# Altium PCB carrier_board.PcbDoc (part 13 of 18)
Units mm, origin at the board's own origin, x right, y up, seen from the top; angles counter-clockwise.
Board outline 146 x 102 mm, 20 copper layers (F.Cu, F.Mask, B.Cu, B.Mask, In1.Cu, F.SilkS, In2.Cu, B.SilkS, F.Adhes, B.Adhes, F.Paste, B.Paste, Dwgs.User, Cmts.User, Eco1.User, Eco2.User, Edge.Cuts, Margin, B.CrtYd, F.CrtYd); 256 components, 384 nets, 1262 pads, 1024 vias.
Unrouted connection lines stored in the file: 117.
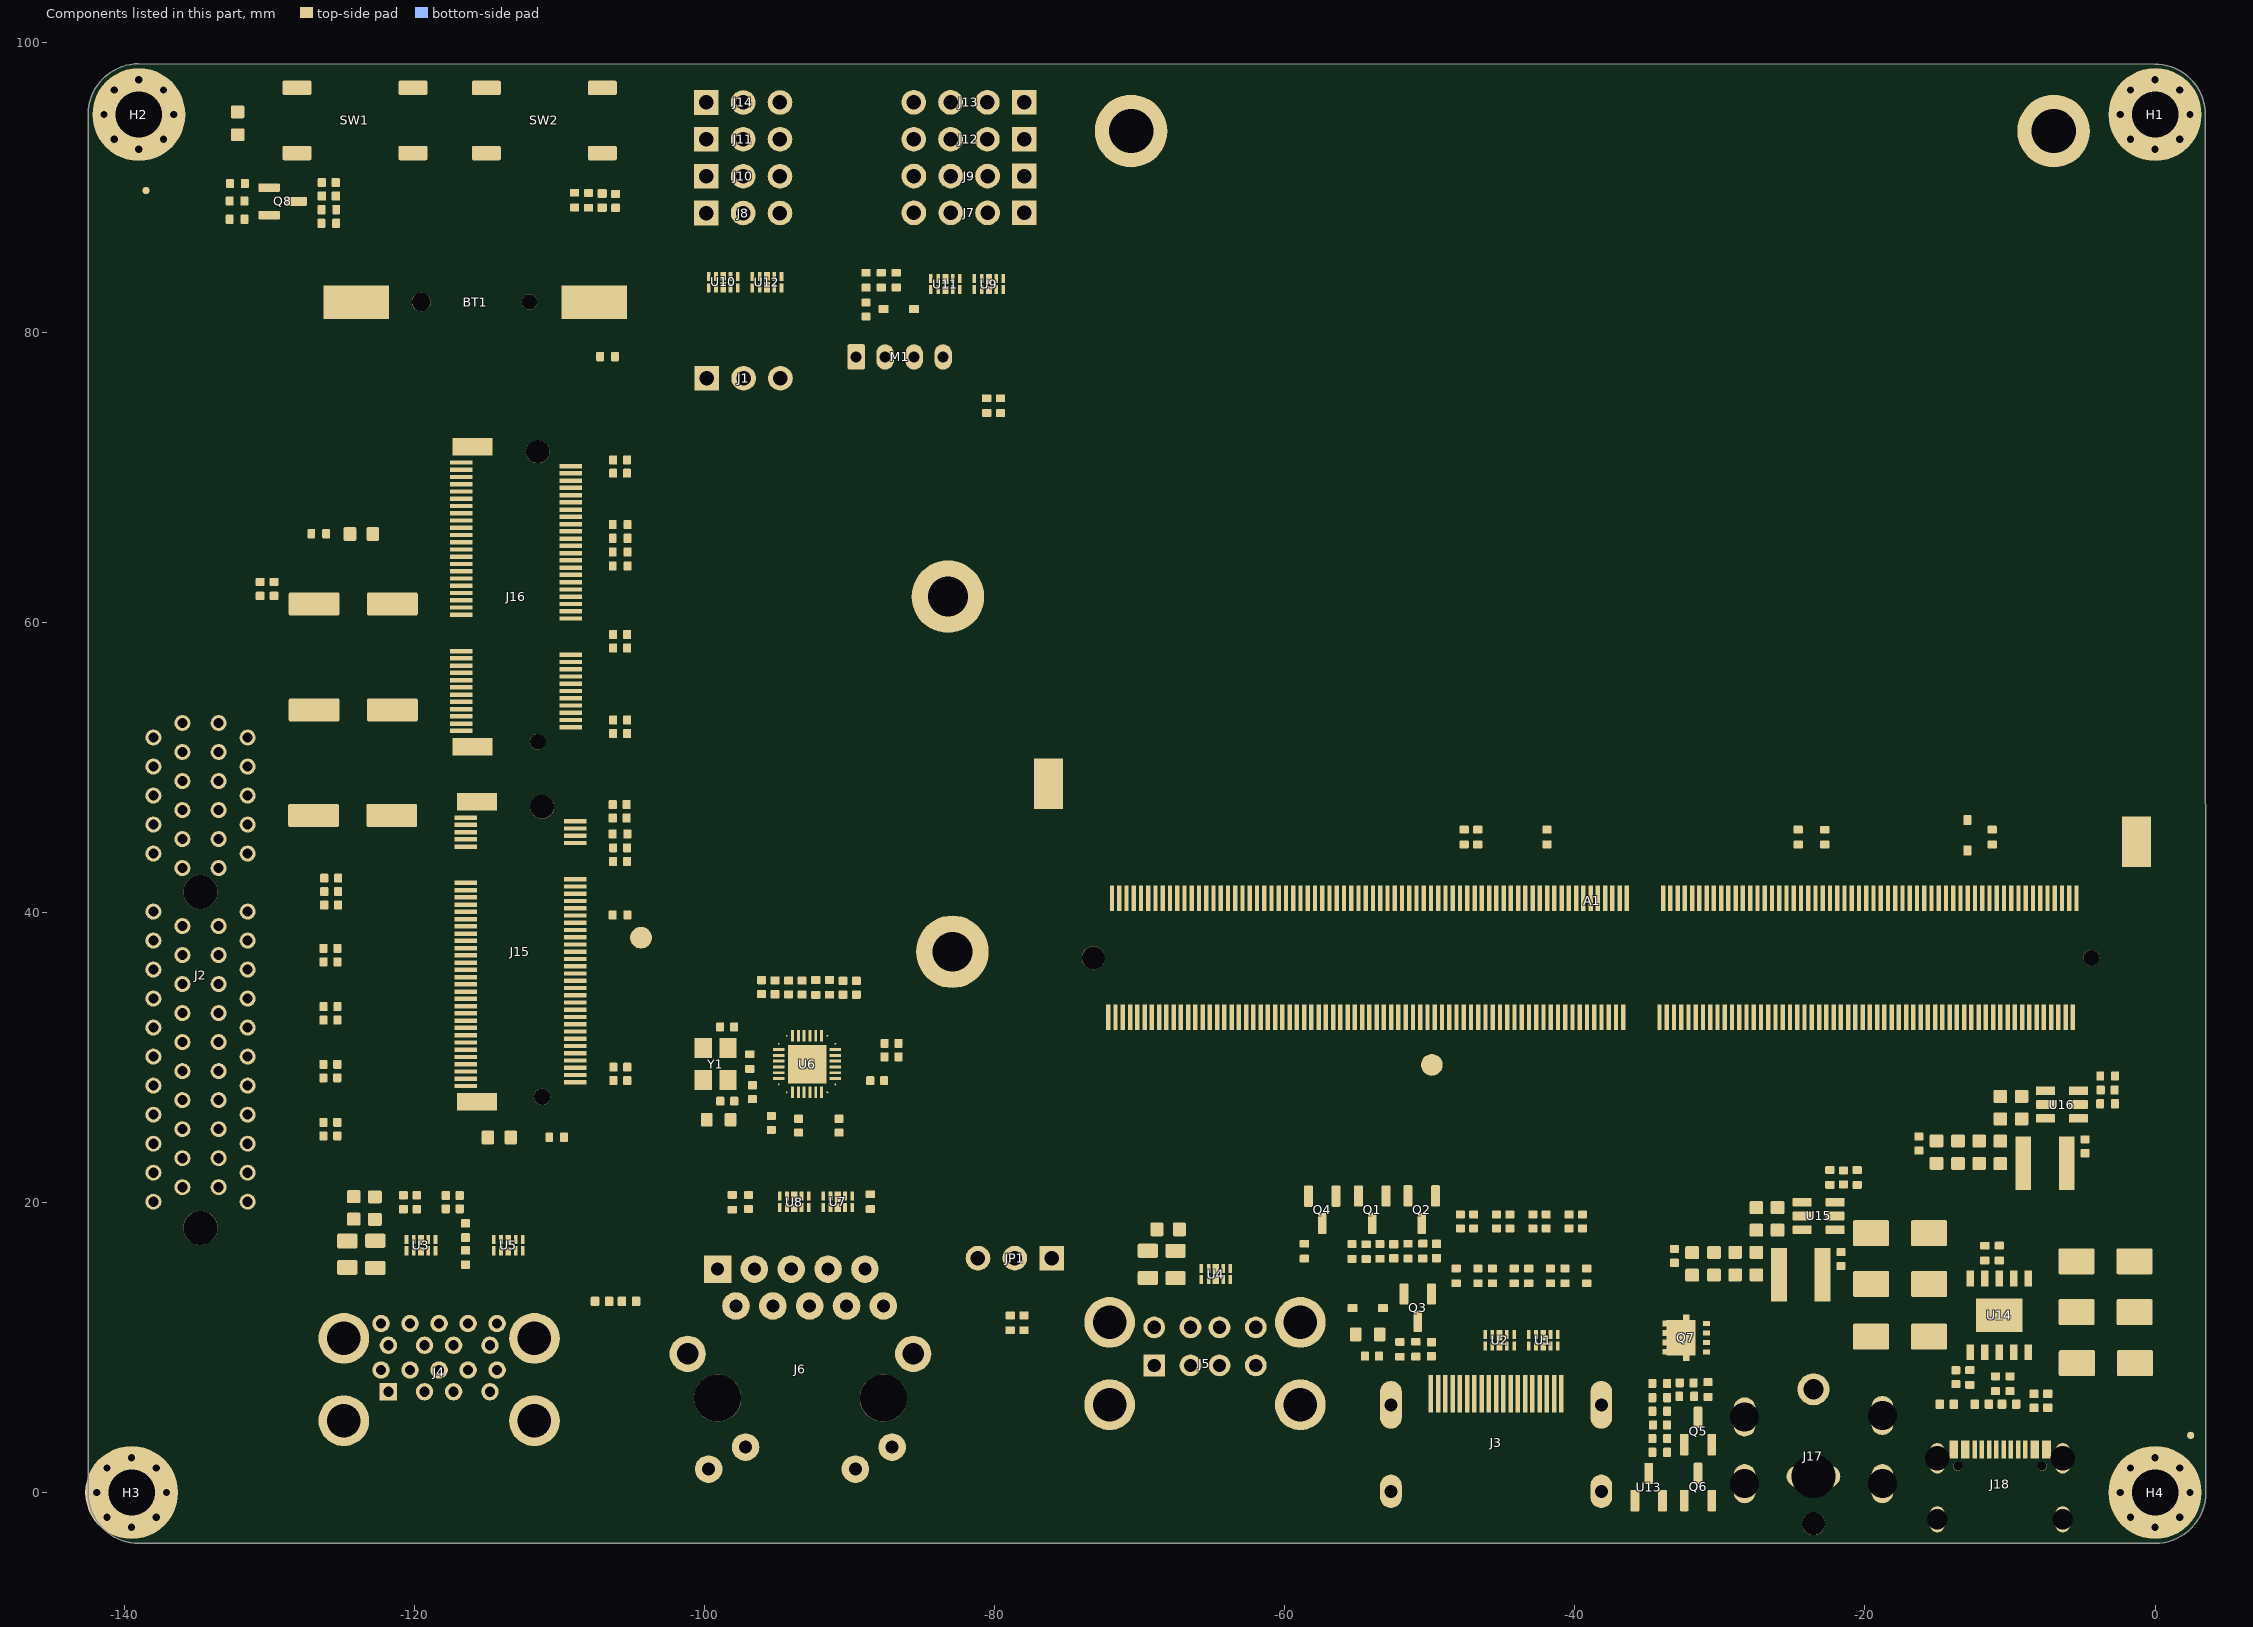
[diagram p23: the components of this part, seen from the top]

## Polygon pours and split planes (outlines as drawn) (continued)
TMDS_D0+ on F.Cu "F.Cu-/HDMI/TMDS_D0+-7" (solid, remove dead copper, pour order 31417): -44.699,14.799 -44.635,14.727 -44.57,14.632 -44.531,14.555 -44.506,14.475 -44.5,14.421 -44.505,14.368 -44.184,14.429 -44.073,14.7 -44.183,14.712 -44.312,14.764 -44.456,14.858 -44.554,14.944
CON_USB3_SSTX_P on F.Cu "F.Cu-/USB2.0&USB3.0/CON_USB3_SSTX_P-3" (solid, remove dead copper, pour order 32049): -120.351,17.007 -120.367,17.121 -120.383,17.188 -120.413,17.323 -120.425,17.462 -120.55,17.446 -120.598,17.133 -120.569,17.128 -120.548,17.115 -120.526,17.073 -120.521,17.013 -120.521,17.007
I2C3_SCL on F.Cu "F.Cu-/GPIO/I2C3_SCL-5" (solid, remove dead copper, pour order 32002): -82.975,82.436 -82.98,82.368 -82.992,82.317 -83.03,82.243 -83.066,82.178 -83.096,82.079 -82.9,82.039 -82.704,82.079 -82.743,82.195 -82.77,82.243 -82.809,82.318 -82.821,82.369 -82.825,82.436
Net-(D26-A) on F.Cu "F.Cu-Net-(D26-A)-4" (solid, remove dead copper, pour order 31310): -86.173,83.816 -86.259,83.887 -86.336,83.946 -86.406,84.014 -86.456,84.088 -86.469,84.128 -86.47,84.169 -86.791,84.091 -86.891,83.82 -86.797,83.813 -86.701,83.769 -86.595,83.682 -86.509,83.591 -86.456,83.533
{\W\A\K\E\}\ on F.Cu "F.Cu-/~{WAKE}-6" (solid, remove dead copper, pour order 31817): -103.806,41.95 -103.728,41.945 -103.672,41.933 -103.607,41.907 -103.543,41.879 -103.449,41.854 -103.409,42.05 -103.449,42.246 -103.581,42.205 -103.607,42.193 -103.686,42.163 -103.806,42.15
TMDS_D0- on F.Cu "F.Cu-/HDMI/TMDS_D0--6" (solid, remove dead copper, pour order 31443): -45.207,14.048 -45.258,14.106 -45.31,14.183 -45.347,14.258 -45.371,14.338 -45.377,14.397 -45.371,14.455 -45.365,14.477 -45.686,14.431 -45.806,14.16 -45.705,14.144 -45.582,14.087 -45.44,13.983 -45.353,13.902
Net-(U6-RSET) on F.Cu "F.Cu-Net-(U6-RSET)" (solid, remove dead copper, pour order 31282): 17 vertices, not listed, extent -98.211,25.3 -97.41,26.1
Net-(D25-A2) on F.Cu "F.Cu-Net-(D25-A2)-3" (solid, remove dead copper, pour order 31596): -106.72,89.51 -106.664,89.505 -106.598,89.488 -106.534,89.462 -106.475,89.423 -106.439,89.386 -106.412,89.341 -106.399,89.291 -106.129,89.53 -106.354,89.799 -106.392,89.758 -106.473,89.727 -106.611,89.711 -106.706,89.71 -106.72,89.71
+3V3 on F.Cu "F.Cu-+3V3-68" (solid, remove dead copper, pour order 31591): -106.85,29.22 -106.779,29.214 -106.695,29.196 -106.628,29.17 -106.569,29.132 -106.538,29.098 -106.517,29.057 -106.513,29.04 -106.289,29.32 -106.513,29.6 -106.545,29.533 -106.612,29.479 -106.718,29.438 -106.85,29.42
CON_PCIE_TX_0- on F.Cu "F.Cu-/M.2 E&M Key/CON_PCIE_TX_0--1" (solid, remove dead copper, pour order 31487): -115.845,61.481 -115.846,61.481 -115.887,61.483 -115.937,61.492 -115.978,61.517 -115.99,61.538 -115.995,61.566 -116.771,61.51 -116.78,61.36 -116.463,61.358 -116.153,61.332 -115.845,61.311
SOC_UART0_TX on F.Cu "F.Cu-/GPIO/SOC_UART0_TX-2" (solid, remove dead copper, pour order 31978): -96.775,82.066 -96.78,82.003 -96.792,81.955 -96.839,81.876 -96.882,81.81 -96.916,81.709 -96.72,81.669 -96.524,81.709 -96.564,81.837 -96.58,81.869 -96.611,81.947 -96.625,82.066
SOC_UART0_TX on F.Cu "F.Cu-/GPIO/SOC_UART0_TX-1" (solid, remove dead copper, pour order 32129): -96.775,83.49 -96.775,83.475 -96.779,83.405 -96.794,83.377 -96.825,83.365 -96.7,83.052 -96.575,83.365 -96.596,83.37 -96.611,83.382 -96.625,83.427 -96.625,83.475 -96.625,83.49
Net-(U6-CKXTAL1) on F.Cu "F.Cu-Net-(U6-CKXTAL1)-4" (solid, remove dead copper, pour order 31647): -96.77,30.76 -96.789,30.678 -96.816,30.629 -96.854,30.583 -96.899,30.544 -96.952,30.514 -97.006,30.496 -97.064,30.489 -97.073,30.488 -96.88,30.219 -96.56,30.355 -96.592,30.412 -96.614,30.53 -96.62,30.732 -96.62,30.76
SOC_UART1_TX on F.Cu "F.Cu-/GPIO/SOC_UART1_TX-4" (solid, remove dead copper, pour order 32132): -96.275,83.49 -96.275,83.475 -96.279,83.405 -96.294,83.377 -96.325,83.365 -96.2,83.052 -96.075,83.365 -96.096,83.37 -96.111,83.382 -96.125,83.427 -96.125,83.475 -96.125,83.49
HSIO_2_RX- on F.Cu "F.Cu-/LattePanda Module/HSIO_2_RX-" (solid, remove dead copper, pour order 31915): -112.673,38.059 -112.622,38.054 -112.585,38.041 -112.539,37.997 -112.522,37.972 -112.484,37.918 -112.421,37.863 -112.309,38.029 -112.271,38.225 -112.376,38.241 -112.45,38.243 -112.511,38.238 -112.673,38.229
GND on F.Cu "F.Cu-GND-156" (solid, remove dead copper, pour order 31789): -53.065,33.794 -53.06,33.875 -53.048,33.932 -53.024,33.994 -52.998,34.058 -52.974,34.151 -53.17,34.191 -53.366,34.151 -53.326,34.023 -53.31,33.991 -53.279,33.913 -53.265,33.794
I2C2_SDA on F.Cu "F.Cu-/GPIO/I2C2_SDA-2" (solid, remove dead copper, pour order 32137): -79.475,83.37 -79.475,83.355 -79.479,83.285 -79.494,83.257 -79.525,83.245 -79.4,82.932 -79.275,83.245 -79.296,83.25 -79.311,83.262 -79.325,83.307 -79.325,83.355 -79.325,83.37
+BATT on F.Cu "F.Cu-+BATT-2" (solid, remove dead copper, pour order 31980): -43.59,36.964 -43.585,37.034 -43.573,37.086 -43.538,37.158 -43.503,37.223 -43.474,37.321 -43.67,37.361 -43.866,37.321 -43.827,37.207 -43.797,37.156 -43.757,37.081 -43.745,37.031 -43.74,36.964
CON_PCIE_TX_1+ on F.Cu "F.Cu-/M.2 E&M Key/CON_PCIE_TX_1+-1" (solid, remove dead copper, pour order 31490): -115.545,40.001 -115.546,40.001 -115.587,40.003 -115.637,40.012 -115.678,40.037 -115.69,40.058 -115.695,40.086 -116.471,40.03 -116.48,39.88 -116.163,39.878 -115.853,39.852 -115.545,39.831
Net-(J15-DEVSLP) on F.Cu "F.Cu-Net-(J15-DEVSLP)-1" (solid, remove dead copper, pour order 31116): 19 vertices, not listed, extent -105.297,38.104 -104.234,39.12
GND on F.Cu "F.Cu-GND-155" (solid, remove dead copper, pour order 31805): -11.315,41.994 -11.31,42.075 -11.298,42.132 -11.274,42.194 -11.248,42.258 -11.224,42.351 -11.42,42.391 -11.616,42.351 -11.576,42.223 -11.56,42.191 -11.529,42.113 -11.515,41.994
GND on F.Cu "F.Cu-GND-154" (solid, remove dead copper, pour order 31747): -115.966,66.41 -115.883,66.405 -115.823,66.393 -115.764,66.371 -115.7,66.347 -115.609,66.324 -115.569,66.52 -115.609,66.716 -115.734,66.676 -115.77,66.658 -115.847,66.624 -115.966,66.61
+3V3 on F.Cu "F.Cu-+3V3-67" (solid, remove dead copper, pour order 31693): -51.4,15.62 -51.394,15.684 -51.375,15.759 -51.349,15.812 -51.312,15.856 -51.278,15.879 -51.236,15.892 -51.23,15.893 -51.5,16.131 -51.77,15.893 -51.701,15.866 -51.649,15.808 -51.612,15.715 -51.6,15.62
Net-(U6-CKXTAL1) on F.Cu "F.Cu-Net-(U6-CKXTAL1)-3" (solid, remove dead copper, pour order 32151): -95.385,29.665 -95.354,29.667 -95.286,29.67 -95.256,29.661 -95.235,29.64 -94.884,29.74 -95.235,29.84 -95.267,29.813 -95.327,29.809 -95.354,29.812 -95.385,29.815
CC1 on F.Cu "F.Cu-/PSU/CC1-5" (solid, remove dead copper, pour order 31386): -9.84,15.575 -9.846,15.505 -9.869,15.422 -9.894,15.375 -9.929,15.34 -9.959,15.325 -9.995,15.32 -9.74,14.769 -9.485,15.32 -9.519,15.325 -9.548,15.338 -9.595,15.389 -9.628,15.476 -9.64,15.575
GbE_PCIe_CLK+ on F.Cu "F.Cu-/Gigabit Ethernet/GbE_PCIe_CLK+-2" (solid, remove dead copper, pour order 31972): -48.855,42.673 -48.963,42.794 -49.029,42.867 -49.141,42.954 -49.253,42.788 -49.291,42.591 -49.194,42.588 -49.143,42.597 -49.102,42.605 -49.062,42.604 -49.021,42.589 -48.975,42.552
GND on F.Cu "F.Cu-GND-153" (solid, remove dead copper, pour order 31806): -9.565,33.794 -9.56,33.875 -9.548,33.932 -9.524,33.994 -9.498,34.058 -9.474,34.151 -9.67,34.191 -9.866,34.151 -9.826,34.023 -9.81,33.991 -9.779,33.913 -9.765,33.794
GbE_PCIe_RX- on F.Cu "F.Cu-/Gigabit Ethernet/GbE_PCIe_RX--2" (solid, remove dead copper, pour order 31921): -80.611,44.983 -80.616,44.932 -80.629,44.895 -80.673,44.849 -80.698,44.832 -80.752,44.794 -80.807,44.731 -80.641,44.619 -80.445,44.581 -80.429,44.686 -80.427,44.76 -80.432,44.821 -80.441,44.983
GND on F.Cu "F.Cu-GND-152" (solid, remove dead copper, pour order 31395): -104.78,52.53 -104.847,52.525 -104.929,52.518 -105.012,52.521 -105.08,52.548 -105.103,52.574 -105.117,52.61 -105.341,52.33 -105.117,52.05 -105.106,52.082 -105.088,52.105 -105.03,52.135 -104.936,52.142 -104.847,52.135 -104.78,52.13
+3V3 on F.Cu "F.Cu-+3V3-66" (solid, remove dead copper, pour order 31829): -49.985,13.046 -49.99,12.968 -50.002,12.912 -50.028,12.847 -50.056,12.783 -50.081,12.689 -49.885,12.649 -49.689,12.689 -49.73,12.821 -49.742,12.847 -49.772,12.926 -49.785,13.046
GND on F.Cu "F.Cu-GND-151" (solid, remove dead copper, pour order 31766): -31.015,39.926 -31.02,39.846 -31.032,39.788 -31.056,39.726 -31.082,39.662 -31.106,39.569 -30.91,39.529 -30.714,39.569 -30.754,39.697 -30.77,39.729 -30.801,39.807 -30.815,39.926
TMDS_D2- on F.Cu "F.Cu-/HDMI/TMDS_D2--5" (solid, remove dead copper, pour order 31435): -40.353,14.958 -40.462,14.859 -40.606,14.76 -40.682,14.725 -40.758,14.704 -40.806,14.7 -40.686,14.429 -40.365,14.383 -40.377,14.475 -40.354,14.583 -40.292,14.706 -40.207,14.812
+3V3 on F.Cu "F.Cu-+3V3-65" (solid, remove dead copper, pour order 31581): -105.41,66.38 -105.416,66.295 -105.437,66.194 -105.463,66.129 -105.501,66.073 -105.532,66.045 -105.57,66.027 -105.31,65.789 -105.05,66.027 -105.112,66.066 -105.162,66.141 -105.198,66.257 -105.21,66.38
+3V3 on F.Cu "F.Cu-+3V3-64" (solid, remove dead copper, pour order 31813): -106.196,24.39 -106.118,24.385 -106.062,24.373 -105.997,24.347 -105.933,24.319 -105.839,24.294 -105.799,24.49 -105.839,24.686 -105.971,24.645 -105.997,24.633 -106.076,24.603 -106.196,24.59
Net-(U13-K) on F.Cu "F.Cu-Net-(U13-K)-2" (solid, remove dead copper, pour order 31498): -34.787,7.133 -34.789,7.043 -34.805,6.936 -34.821,6.884 -34.844,6.839 -34.877,6.802 -34.92,6.779 -34.66,6.542 -34.4,6.779 -34.459,6.817 -34.501,6.888 -34.527,7 -34.533,7.133
CON_USB4_D_P on F.Cu "F.Cu-/USB2.0&USB3.0/CON_USB4_D_P-4" (solid, remove dead copper, pour order 31176): 19 vertices, not listed, extent -118.355,9.651 -117.299,10.738
CON_PCIE_TX_0+ on F.Cu "F.Cu-/M.2 E&M Key/CON_PCIE_TX_0+-1" (solid, remove dead copper, pour order 31549): -106.803,58.464 -106.721,58.41 -106.678,58.363 -106.639,58.307 -106.609,58.244 -106.589,58.175 -106.58,58.069 -106.299,58.22 -106.262,58.53 -106.368,58.521 -106.528,58.545 -106.736,58.609 -106.803,58.634
HSIO_2_TX- on F.Cu "F.Cu-/LattePanda Module/HSIO_2_TX--2" (solid, remove dead copper, pour order 31931): -65.694,36.987 -65.689,37.038 -65.676,37.075 -65.632,37.121 -65.607,37.138 -65.553,37.176 -65.498,37.239 -65.664,37.351 -65.86,37.389 -65.876,37.284 -65.878,37.21 -65.873,37.149 -65.864,36.987
{\P\W\R\_\L\E\D\}\{\s\l\a\s\h\}\{PSON} on F.Cu "F.Cu-/~{PWR_LED}{slash}~{PSON}-3" (solid, remove dead copper, pour order 31983): -71.733,72.097 -71.688,72.045 -71.661,72.001 -71.635,71.922 -71.615,71.85 -71.566,71.759 -71.399,71.869 -71.289,72.036 -71.399,72.091 -71.452,72.105 -71.532,72.132 -71.576,72.159 -71.627,72.203
GND on F.Cu "F.Cu-GND-150" (solid, remove dead copper, pour order 32016): -90.81,24.63 -90.805,24.524 -90.792,24.453 -90.78,24.409 -90.746,24.271 -90.55,24.309 -90.439,24.476 -90.52,24.513 -90.558,24.522 -90.599,24.533 -90.631,24.55 -90.652,24.579 -90.66,24.63
+1V0 on F.Cu "F.Cu-+1V0-14" (solid, remove dead copper, pour order 32152): -93.61,31.99 -93.607,31.958 -93.605,31.89 -93.614,31.861 -93.635,31.84 -93.535,31.489 -93.435,31.84 -93.461,31.872 -93.465,31.932 -93.463,31.958 -93.46,31.99
+3V3 on F.Cu "F.Cu-+3V3-63" (solid, remove dead copper, pour order 31625): -95.475,26.52 -95.495,26.401 -95.522,26.33 -95.561,26.266 -95.598,26.225 -95.642,26.195 -95.68,26.183 -95.4,25.959 -95.12,26.183 -95.19,26.215 -95.253,26.285 -95.303,26.395 -95.325,26.52
HSIO_11_RX+ on F.Cu "F.Cu-/LattePanda Module/HSIO_11_RX+" (solid, remove dead copper, pour order 31924): -57.886,36.753 -57.891,36.702 -57.904,36.665 -57.948,36.619 -57.973,36.602 -58.027,36.564 -58.082,36.501 -57.916,36.389 -57.72,36.351 -57.704,36.456 -57.702,36.53 -57.707,36.591 -57.716,36.753
HSIO_8_RX+ on F.Cu "F.Cu-/LattePanda Module/HSIO_8_RX+" (solid, remove dead copper, pour order 31927): -62.386,36.753 -62.391,36.702 -62.404,36.665 -62.448,36.619 -62.473,36.602 -62.527,36.564 -62.582,36.501 -62.416,36.389 -62.22,36.351 -62.204,36.456 -62.202,36.53 -62.207,36.591 -62.216,36.753
Net-(J6-PadL3) on F.Cu "F.Cu-Net-(J6-PadL3)" (solid, remove dead copper, pour order 31020): 25 vertices, not listed, extent -97.36,2.945 -96.092,4.213
GND on F.Cu "F.Cu-GND-149" (solid, remove dead copper, pour order 31753): -115.496,67.674 -115.441,67.613 -115.409,67.563 -115.382,67.504 -115.354,67.441 -115.306,67.359 -115.139,67.469 -115.029,67.636 -115.147,67.697 -115.182,67.71 -115.26,67.741 -115.354,67.816
REFCLK2- on F.Cu "F.Cu-/LattePanda Module/REFCLK2--1" (solid, remove dead copper, pour order 31910): -46.843,35.899 -46.792,35.894 -46.755,35.881 -46.709,35.837 -46.692,35.812 -46.654,35.758 -46.591,35.703 -46.479,35.869 -46.441,36.065 -46.546,36.081 -46.62,36.083 -46.681,36.078 -46.843,36.069
GND on F.Cu "F.Cu-GND-148" (solid, remove dead copper, pour order 31760): -52.515,39.926 -52.52,39.846 -52.532,39.788 -52.556,39.726 -52.582,39.662 -52.606,39.569 -52.41,39.529 -52.214,39.569 -52.254,39.697 -52.27,39.729 -52.301,39.807 -52.315,39.926
+3V3 on F.Cu "F.Cu-+3V3-62" (solid, remove dead copper, pour order 31633): -88.68,21.1 -88.686,21.027 -88.706,20.939 -88.732,20.88 -88.769,20.832 -88.801,20.808 -88.84,20.795 -88.844,20.795 -88.57,20.559 -88.304,20.8 -88.371,20.826 -88.424,20.885 -88.464,20.981 -88.48,21.1
TMDS_D2+ on F.Cu "F.Cu-/HDMI/TMDS_D2+-6" (solid, remove dead copper, pour order 32090): -41.077,10.448 -41.082,10.48 -41.09,10.541 -41.08,10.564 -41.055,10.572 -41.18,10.886 -41.305,10.572 -41.285,10.568 -41.274,10.555 -41.271,10.513 -41.278,10.48 -41.283,10.448
HSIO_1_TX- on F.Cu "F.Cu-/LattePanda Module/HSIO_1_TX--1" (solid, remove dead copper, pour order 31940): -80.137,20.449 -80.299,20.458 -80.398,20.464 -80.539,20.445 -80.501,20.249 -80.389,20.083 -80.317,20.149 -80.288,20.192 -80.264,20.226 -80.236,20.254 -80.196,20.272 -80.137,20.279
GND on F.Cu "F.Cu-GND-147" (solid, remove dead copper, pour order 31791): -56.065,33.794 -56.06,33.875 -56.048,33.932 -56.024,33.994 -55.998,34.058 -55.974,34.151 -56.17,34.191 -56.366,34.151 -56.326,34.023 -56.31,33.991 -56.279,33.913 -56.265,33.794
GND on F.Cu "F.Cu-GND-146" (solid, remove dead copper, pour order 31556): -99.025,32.69 -99.031,32.609 -99.051,32.512 -99.077,32.442 -99.114,32.381 -99.148,32.348 -99.189,32.325 -99.194,32.323 -98.925,32.099 -98.656,32.323 -98.72,32.363 -98.772,32.439 -98.81,32.556 -98.825,32.69
I2C4_SCL on F.Cu "F.Cu-/GPIO/I2C4_SCL-3" (solid, remove dead copper, pour order 32119): -83.825,82.495 -83.825,82.51 -83.821,82.58 -83.806,82.608 -83.775,82.62 -83.9,82.933 -84.025,82.62 -84.004,82.615 -83.989,82.603 -83.975,82.558 -83.975,82.51 -83.975,82.495
Net-(D9-A) on F.Cu "F.Cu-Net-(D9-A)-1" (solid, remove dead copper, pour order 31244): 17 vertices, not listed, extent -113.363,24.042 -112.487,24.917
{\R\S\T\_\S\W\}\ on F.Cu "F.Cu-/LattePanda Module/~{RST_SW}-2" (solid, remove dead copper, pour order 31422): -107.488,88.199 -107.549,88.268 -107.612,88.359 -107.652,88.437 -107.678,88.518 -107.685,88.576 -107.68,88.632 -108.001,88.571 -108.112,88.3 -108.001,88.288 -107.871,88.236 -107.726,88.142 -107.629,88.058
CON_USB4_SSRX_P on F.Cu "F.Cu-/USB2.0&USB3.0/CON_USB4_SSRX_P-3" (solid, remove dead copper, pour order 32033): -113.001,17.107 -113.001,17.102 -113.01,17.028 -113.033,16.996 -113.078,16.983 -113.03,16.669 -112.905,16.653 -112.893,16.792 -112.863,16.927 -112.841,17.024 -112.831,17.107
+3V3 on F.Cu "F.Cu-+3V3-61" (solid, remove dead copper, pour order 31874): -91.285,35.794 -91.28,35.87 -91.268,35.925 -91.24,35.991 -91.21,36.056 -91.184,36.151 -91.38,36.191 -91.576,36.151 -91.535,36.015 -91.526,35.994 -91.497,35.915 -91.485,35.794
GND on F.Cu "F.Cu-GND-145" (solid, remove dead copper, pour order 31818): -115.696,70.91 -115.618,70.905 -115.562,70.893 -115.497,70.867 -115.433,70.839 -115.339,70.814 -115.299,71.01 -115.339,71.206 -115.471,71.165 -115.497,71.153 -115.576,71.123 -115.696,71.11
I2C3_SDA on F.Cu "F.Cu-/GPIO/I2C3_SDA-2" (solid, remove dead copper, pour order 31047): 23 vertices, not listed, extent -81.197,86.886 -79.783,88.221
HSIO_11_TX- on F.Cu "F.Cu-/LattePanda Module/HSIO_11_TX--1" (solid, remove dead copper, pour order 31899): -58.364,29.651 -58.373,29.486 -58.379,29.385 -58.36,29.241 -58.164,29.279 -57.998,29.391 -58.069,29.473 -58.087,29.488 -58.142,29.548 -58.158,29.59 -58.163,29.651
I2C2_SCL on F.Cu "F.Cu-/GPIO/I2C2_SCL-4" (solid, remove dead copper, pour order 31994): -57.717,77.123 -57.762,77.175 -57.789,77.219 -57.815,77.298 -57.835,77.37 -57.884,77.461 -58.051,77.351 -58.161,77.184 -58.051,77.129 -57.998,77.115 -57.918,77.088 -57.874,77.061 -57.823,77.017
GND on F.Cu "F.Cu-GND-144" (solid, remove dead copper, pour order 31664): -117.395,31.43 -117.369,31.432 -117.289,31.431 -117.258,31.415 -117.245,31.38 -116.469,31.53 -117.245,31.68 -117.25,31.657 -117.262,31.641 -117.307,31.627 -117.369,31.628 -117.395,31.63
DDI_B_DDC_SDA on F.Cu "F.Cu-/HDMI/DDI_B_DDC_SDA-2" (solid, remove dead copper, pour order 31280): -51.732,12.65 -51.727,12.713 -51.71,12.789 -51.684,12.86 -51.645,12.926 -51.608,12.966 -51.564,12.996 -51.517,13.011 -51.785,13.688 -52.074,13.043 -52.02,13.002 -51.977,12.923 -51.947,12.793 -51.938,12.65
GND on F.Cu "F.Cu-GND-143" (solid, remove dead copper, pour order 31872): -45.765,31.876 -45.77,31.8 -45.782,31.745 -45.81,31.679 -45.84,31.614 -45.866,31.519 -45.67,31.479 -45.474,31.519 -45.515,31.655 -45.524,31.676 -45.553,31.755 -45.565,31.876
TMDS_D1+ on F.Cu "F.Cu-/HDMI/TMDS_D1+-7" (solid, remove dead copper, pour order 31461): -42.179,17.697 -42.132,17.785 -42.091,17.83 -42.039,17.87 -41.983,17.9 -41.919,17.921 -41.817,17.93 -41.975,18.211 -42.285,18.238 -42.277,18.137 -42.301,17.981 -42.362,17.768 -42.384,17.697
GND on F.Cu "F.Cu-GND-142" (solid, remove dead copper, pour order 31092): 18 vertices, not listed, extent -62.624,8.761 -61.376,9.998
HSIO_0_TX+ on F.Cu "F.Cu-/LattePanda Module/HSIO_0_TX+-1" (solid, remove dead copper, pour order 31534): -120.523,20.998 -120.575,20.915 -120.621,20.872 -120.676,20.833 -120.738,20.803 -120.806,20.782 -120.915,20.772 -120.762,20.491 -120.452,20.456 -120.461,20.563 -120.438,20.724 -120.375,20.936 -120.353,20.998
CON_USB3_D_P on F.Cu "F.Cu-/USB2.0&USB3.0/CON_USB3_D_P-4" (solid, remove dead copper, pour order 31212): 18 vertices, not listed, extent -118.13,6.12 -117.183,7.067
HSIO_1_TX- on F.Cu "F.Cu-/LattePanda Module/HSIO_1_TX-" (solid, remove dead copper, pour order 31518): -116.375,19.969 -116.598,19.897 -116.729,19.869 -116.852,19.861 -116.916,19.87 -116.881,19.56 -116.6,19.407 -116.587,19.53 -116.539,19.647 -116.46,19.744 -116.375,19.799
DDI_B_DDC_SDA on F.Cu "F.Cu-/HDMI/DDI_B_DDC_SDA-1" (solid, remove dead copper, pour order 31389): 17 vertices, not listed, extent -51.786,13.542 -51.194,14.3
Net-(U6-CKXTAL2) on F.Cu "F.Cu-Net-(U6-CKXTAL2)-4" (solid, remove dead copper, pour order 31220): 20 vertices, not listed, extent -98.386,28.081 -97.285,29.14
PWR_EN on F.Cu "F.Cu-/PSU/PWR_EN-7" (solid, remove dead copper, pour order 31846): -32.35,0.434 -32.345,0.512 -32.333,0.568 -32.307,0.633 -32.279,0.697 -32.254,0.791 -32.45,0.831 -32.646,0.791 -32.605,0.659 -32.593,0.633 -32.563,0.554 -32.55,0.434
PCIE30_TX3_P on F.Cu "F.Cu-/PCIe x4/PCIE30_TX3_P-1" (solid, remove dead copper, pour order 31526): -126.783,25.106 -126.601,25.17 -126.492,25.198 -126.383,25.216 -126.308,25.219 -126.242,25.21 -126.279,25.52 -126.56,25.671 -126.573,25.548 -126.621,25.43 -126.701,25.331 -126.783,25.276
+1V0 on F.Cu "F.Cu-+1V0-13" (solid, remove dead copper, pour order 32163): 19 vertices, not listed, extent -95.341,33.171 -95.07,33.294
PWR_EN on F.Cu "F.Cu-/PSU/PWR_EN-6" (solid, remove dead copper, pour order 31276): -32.55,0.483 -32.555,0.411 -32.573,0.326 -32.599,0.248 -32.638,0.177 -32.674,0.135 -32.717,0.103 -32.749,0.09 -32.46,-0.556 -32.171,0.09 -32.236,0.131 -32.291,0.209 -32.332,0.33 -32.35,0.483
CC2 on F.Cu "F.Cu-/PSU/CC2-2" (solid, remove dead copper, pour order 31554): -9.018,5.762 -8.931,5.75 -8.826,5.724 -8.736,5.691 -8.656,5.646 -8.613,5.609 -8.582,5.567 -8.574,5.546 -8.344,5.829 -8.574,6.114 -8.619,6.031 -8.691,5.973 -8.783,5.941 -8.842,5.938
GbE_PCIe_CLK+ on F.Cu "F.Cu-/Gigabit Ethernet/GbE_PCIe_CLK+-1" (solid, remove dead copper, pour order 32069): -90.488,30.689 -90.659,30.667 -90.816,30.643 -90.992,30.64 -90.986,30.54 -90.585,30.49 -90.581,30.511 -90.569,30.522 -90.529,30.524 -90.51,30.521 -90.488,30.519
TMDS_CK- on F.Cu "F.Cu-/HDMI/TMDS_CK--4" (solid, remove dead copper, pour order 32092): -46.293,10.547 -46.288,10.515 -46.28,10.454 -46.29,10.431 -46.315,10.422 -46.19,10.109 -46.065,10.422 -46.085,10.427 -46.096,10.44 -46.099,10.482 -46.092,10.515 -46.087,10.547
{\W\A\K\E\}\ on F.Cu "F.Cu-/~{WAKE}-5" (solid, remove dead copper, pour order 31750): -74.004,47.84 -74.087,47.845 -74.147,47.857 -74.206,47.879 -74.27,47.903 -74.361,47.926 -74.401,47.73 -74.361,47.534 -74.236,47.574 -74.2,47.592 -74.123,47.626 -74.004,47.64
REFCLK2+ on F.Cu "F.Cu-/LattePanda Module/REFCLK2+-2" (solid, remove dead copper, pour order 31944): -120.443,38.965 -120.281,38.956 -120.182,38.95 -120.041,38.969 -120.079,39.165 -120.191,39.331 -120.263,39.265 -120.292,39.222 -120.316,39.188 -120.344,39.16 -120.384,39.142 -120.443,39.135
GND on F.Cu "F.Cu-GND-141" (solid, remove dead copper, pour order 31011): 21 vertices, not listed, extent -99.881,92.44 -98.53,94.14
{\C\L\K\R\E\Q\E\}\ on F.Cu "F.Cu-/M.2 E&M Key/~{CLKREQE}-3" (solid, remove dead copper, pour order 31751): -106.684,63.98 -106.767,63.985 -106.827,63.997 -106.886,64.019 -106.95,64.043 -107.041,64.066 -107.081,63.87 -107.041,63.674 -106.916,63.714 -106.88,63.732 -106.803,63.766 -106.684,63.78
Net-(J16-SUSCLK) on F.Cu "F.Cu-Net-(J16-SUSCLK)-1" (solid, remove dead copper, pour order 31663): -108.295,64.86 -108.321,64.858 -108.401,64.859 -108.432,64.875 -108.445,64.91 -109.221,64.76 -108.445,64.61 -108.44,64.633 -108.428,64.649 -108.383,64.663 -108.321,64.662 -108.295,64.66
HSO- on F.Cu "F.Cu-/Gigabit Ethernet/HSO--1" (solid, remove dead copper, pour order 31516): -90.046,33.814 -90.118,34.038 -90.146,34.169 -90.154,34.292 -90.145,34.356 -90.455,34.321 -90.608,34.04 -90.485,34.027 -90.368,33.978 -90.271,33.899 -90.216,33.814
GND on F.Cu "F.Cu-GND-140" (solid, remove dead copper, pour order 31885): -68.065,34.384 -68.06,34.456 -68.048,34.508 -68.015,34.579 -67.982,34.644 -67.954,34.741 -68.15,34.781 -68.346,34.741 -68.302,34.589 -68.276,34.507 -68.265,34.384
TMDS_D1- on F.Cu "F.Cu-/HDMI/TMDS_D1--6" (solid, remove dead copper, pour order 31444): -42.707,14.048 -42.758,14.106 -42.81,14.183 -42.847,14.258 -42.871,14.338 -42.877,14.397 -42.871,14.455 -42.865,14.477 -43.186,14.431 -43.306,14.16 -43.205,14.144 -43.082,14.087 -42.94,13.983 -42.853,13.902
DDI_B_TX3- on F.Cu "F.Cu-/HDMI/DDI_B_TX3-" (solid, remove dead copper, pour order 31464): -47.69,19.683 -47.737,19.595 -47.778,19.55 -47.83,19.51 -47.886,19.48 -47.95,19.459 -48.052,19.45 -47.894,19.169 -47.584,19.142 -47.592,19.243 -47.568,19.399 -47.507,19.612 -47.485,19.683
{\W\A\K\E\}\ on F.Cu "F.Cu-/~{WAKE}-4" (solid, remove dead copper, pour order 31698): -108.07,41.361 -108.071,41.361 -108.118,41.367 -108.137,41.388 -108.145,41.43 -108.921,41.279 -108.145,41.139 -108.127,41.175 -108.071,41.201 -107.94,41.219 -107.929,41.22
SOC_UART1_TX on F.Cu "F.Cu-/GPIO/SOC_UART1_TX-3" (solid, remove dead copper, pour order 31974): -96.275,82.529 -96.28,82.452 -96.292,82.396 -96.319,82.331 -96.347,82.267 -96.373,82.172 -96.177,82.132 -95.981,82.172 -95.997,82.233 -96.018,82.28 -96.059,82.339 -96.105,82.412 -96.12,82.462 -96.125,82.529
GND on F.Cu "F.Cu-GND-139" (solid, remove dead copper, pour order 31799): -14.315,41.994 -14.31,42.075 -14.298,42.132 -14.274,42.194 -14.248,42.258 -14.224,42.351 -14.42,42.391 -14.616,42.351 -14.576,42.223 -14.56,42.191 -14.529,42.113 -14.515,41.994
MDI0- on F.Cu "F.Cu-/Gigabit Ethernet/MDI0--1" (solid, remove dead copper, pour order 31083): 18 vertices, not listed, extent -97.497,14.332 -96.38,15.4
MDI0+ on F.Cu "F.Cu-/Gigabit Ethernet/MDI0+-1" (solid, remove dead copper, pour order 31026): 24 vertices, not listed, extent -98.625,12.859 -97.045,14.292
5V_HDMI_VCC on F.Cu "F.Cu-5V_HDMI_VCC" (solid, remove dead copper, pour order 31236): 18 vertices, not listed, extent -53.845,10.025 -53.075,10.901
+12V on F.Cu "F.Cu-+12V-6" (solid, remove dead copper, pour order 31557): -32.87,8.153 -32.876,8.072 -32.896,7.975 -32.922,7.905 -32.959,7.843 -32.993,7.81 -33.034,7.788 -33.039,7.786 -32.77,7.561 -32.501,7.786 -32.565,7.826 -32.617,7.902 -32.655,8.019 -32.67,8.153
TMDS_D0+ on F.Cu "F.Cu-/HDMI/TMDS_D0+-6" (solid, remove dead copper, pour order 31440): -44.517,13.902 -44.408,14.001 -44.264,14.1 -44.188,14.135 -44.112,14.156 -44.064,14.16 -44.184,14.431 -44.505,14.477 -44.493,14.385 -44.516,14.277 -44.578,14.154 -44.663,14.048
GND on F.Cu "F.Cu-GND-138" (solid, remove dead copper, pour order 31659): -115.845,52.61 -115.871,52.608 -115.951,52.609 -115.982,52.625 -115.995,52.66 -116.771,52.51 -115.995,52.36 -115.99,52.383 -115.978,52.399 -115.933,52.413 -115.871,52.412 -115.845,52.41
Net-(Q4-D) on F.Cu "F.Cu-Net-(Q4-D)-7" (solid, remove dead copper, pour order 31734): -43.79,15.542 -43.812,15.536 -43.835,15.54 -43.884,15.581 -43.938,15.681 -43.948,15.71 -44.185,15.449 -43.899,15.228 -43.87,15.297 -43.79,15.391 -43.651,15.502 -43.584,15.542
PCIE30_TX0_N on F.Cu "F.Cu-/PCIe x4/PCIE30_TX0_N-1" (solid, remove dead copper, pour order 31548): -126.773,36.824 -126.691,36.77 -126.648,36.723 -126.609,36.667 -126.579,36.604 -126.559,36.535 -126.55,36.429 -126.269,36.58 -126.232,36.89 -126.338,36.881 -126.498,36.905 -126.706,36.969 -126.773,36.994
CON_USB4_SSTX_N on F.Cu "F.Cu-/USB2.0&USB3.0/CON_USB4_SSTX_N-3" (solid, remove dead copper, pour order 32064): -118.749,17.882 -118.733,17.769 -118.717,17.702 -118.687,17.567 -118.675,17.428 -118.55,17.444 -118.502,17.758 -118.531,17.762 -118.552,17.775 -118.574,17.817 -118.579,17.877 -118.579,17.882
TMDS_D2+ on F.Cu "F.Cu-/HDMI/TMDS_D2+-5" (solid, remove dead copper, pour order 31332): -41.033,8.255 -41.031,8.227 -41.031,8.148 -41.046,8.117 -41.08,8.105 -40.93,6.804 -40.78,8.105 -40.803,8.11 -40.819,8.122 -40.832,8.167 -40.829,8.227 -40.827,8.255
HSIO_9_TX+ on F.Cu "F.Cu-/LattePanda Module/HSIO_9_TX+-2" (solid, remove dead copper, pour order 31895): -61.667,29.651 -61.671,29.594 -61.685,29.554 -61.729,29.5 -61.743,29.488 -61.785,29.449 -61.832,29.391 -61.666,29.279 -61.47,29.241 -61.453,29.347 -61.451,29.422 -61.457,29.486 -61.466,29.651
REFCLK2- on F.Cu "F.Cu-/LattePanda Module/REFCLK2-" (solid, remove dead copper, pour order 31917): -120.443,38.693 -120.392,38.688 -120.355,38.675 -120.309,38.631 -120.292,38.606 -120.254,38.552 -120.191,38.497 -120.079,38.663 -120.041,38.859 -120.146,38.875 -120.22,38.877 -120.281,38.872 -120.443,38.863
Net-(U6-CKXTAL1) on F.Cu "F.Cu-Net-(U6-CKXTAL1)-2" (solid, remove dead copper, pour order 31508): -97.268,29.726 -97.136,29.829 -97.047,29.879 -96.95,29.92 -96.871,29.942 -96.792,29.95 -96.768,29.95 -96.879,30.221 -97.2,30.282 -97.197,30.183 -97.229,30.06 -97.302,29.922 -97.374,29.832
+3V3 on F.Cu "F.Cu-+3V3-60" (solid, remove dead copper, pour order 31902): -79.504,74.32 -79.452,74.315 -79.414,74.302 -79.366,74.258 -79.351,74.239 -79.313,74.19 -79.253,74.139 -79.141,74.305 -79.102,74.501 -79.232,74.522 -79.322,74.525 -79.366,74.523 -79.504,74.52
{\P\W\R\_\S\W\}\ on F.Cu "F.Cu-/LattePanda Module/~{PWR_SW}-2" (solid, remove dead copper, pour order 31981): -72.09,34.434 -72.085,34.504 -72.073,34.556 -72.038,34.628 -72.003,34.693 -71.974,34.791 -72.17,34.831 -72.366,34.791 -72.327,34.677 -72.297,34.626 -72.257,34.551 -72.245,34.501 -72.24,34.434
DDI_B_DDC_SDA on F.Cu "F.Cu-/HDMI/DDI_B_DDC_SDA" (solid, remove dead copper, pour order 31837): -52.34,18.546 -52.345,18.468 -52.357,18.412 -52.383,18.347 -52.411,18.283 -52.436,18.189 -52.24,18.149 -52.044,18.189 -52.085,18.321 -52.097,18.347 -52.127,18.426 -52.14,18.546
+1V0 on F.Cu "F.Cu-+1V0-12" (solid, remove dead copper, pour order 32000): -93.61,26.523 -93.615,26.455 -93.627,26.404 -93.665,26.33 -93.701,26.265 -93.731,26.166 -93.535,26.126 -93.339,26.166 -93.378,26.283 -93.405,26.33 -93.444,26.406 -93.456,26.456 -93.46,26.523
CC1 on F.Cu "F.Cu-/PSU/CC1-4" (solid, remove dead copper, pour order 31904): -13.195,5.766 -13.217,5.796 -13.224,5.822 -13.207,5.864 -13.169,5.904 -13.104,5.979 -13.271,6.091 -13.466,6.051 -13.448,5.882 -13.444,5.817 -13.431,5.758 -13.398,5.697 -13.336,5.625
CON_USB1_D_P on F.Cu "F.Cu-/USB2.0&USB3.0/CON_USB1_D_P-4" (solid, remove dead copper, pour order 32057): -63.949,15.893 -63.933,15.779 -63.917,15.712 -63.887,15.577 -63.875,15.438 -63.75,15.454 -63.702,15.767 -63.731,15.772 -63.752,15.785 -63.774,15.827 -63.779,15.887 -63.779,15.893
+3V3 on F.Cu "F.Cu-+3V3-59" (solid, remove dead copper, pour order 31503): -105.435,67.32 -105.438,67.231 -105.454,67.124 -105.47,67.072 -105.494,67.026 -105.527,66.99 -105.57,66.967 -105.31,66.729 -105.05,66.967 -105.109,67.005 -105.152,67.076 -105.178,67.188 -105.185,67.32
Net-(Q1-D) on F.Cu "F.Cu-Net-(Q1-D)-1" (solid, remove dead copper, pour order 31256): -53.845,17.532 -53.837,17.653 -53.804,17.792 -53.776,17.847 -53.738,17.892 -53.681,17.925 -53.97,18.571 -54.259,17.925 -54.194,17.885 -54.144,17.811 -54.109,17.695 -54.095,17.532
GND on F.Cu "F.Cu-GND-137" (solid, remove dead copper, pour order 31294): -34.541,1.961 -34.554,1.944 -34.579,1.913 -34.606,1.895 -34.619,1.898 -34.631,1.914 -34.649,1.996 -34.911,1.309 -34.61,1.186 -34.592,1.288 -34.535,1.396 -34.432,1.517 -34.328,1.614 -34.259,1.679
GND on F.Cu "F.Cu-GND-136" (solid, remove dead copper, pour order 31680): -115.845,68.11 -115.871,68.108 -115.951,68.109 -115.982,68.125 -115.995,68.16 -116.771,68.01 -115.995,67.86 -115.99,67.883 -115.978,67.899 -115.933,67.913 -115.871,67.912 -115.845,67.91
HSIO_9_RX- on F.Cu "F.Cu-/LattePanda Module/HSIO_9_RX-" (solid, remove dead copper, pour order 31954): -60.614,36.753 -60.623,36.591 -60.629,36.492 -60.61,36.351 -60.414,36.389 -60.248,36.501 -60.314,36.573 -60.357,36.602 -60.391,36.626 -60.419,36.654 -60.437,36.694 -60.444,36.753
+1V0 on F.Cu "F.Cu-+1V0-11" (solid, remove dead copper, pour order 31624): -95.07,33.79 -95.05,33.909 -95.023,33.979 -94.984,34.044 -94.947,34.085 -94.903,34.114 -94.865,34.127 -95.145,34.351 -95.425,34.127 -95.355,34.094 -95.292,34.024 -95.242,33.915 -95.22,33.79
LED1_1000 on F.Cu "F.Cu-/Gigabit Ethernet/LED1_1000-1" (solid, remove dead copper, pour order 32018): -95.453,30.615 -95.518,30.61 -95.566,30.598 -95.634,30.561 -95.696,30.526 -95.789,30.496 -95.751,30.3 -95.584,30.189 -95.552,30.265 -95.545,30.348 -95.542,30.395 -95.531,30.431 -95.504,30.456 -95.453,30.465
HSI- on F.Cu "F.Cu-/Gigabit Ethernet/HSI--1" (solid, remove dead copper, pour order 32071): -90.488,30.161 -90.51,30.158 -90.56,30.155 -90.578,30.165 -90.585,30.189 -90.986,30.14 -90.992,30.04 -90.827,30.038 -90.659,30.012 -90.488,29.991
REFCLK0- on F.Cu "F.Cu-/LattePanda Module/REFCLK0--2" (solid, remove dead copper, pour order 31951): -60.553,48.231 -60.391,48.222 -60.292,48.216 -60.151,48.235 -60.189,48.431 -60.301,48.597 -60.373,48.531 -60.402,48.488 -60.426,48.454 -60.454,48.426 -60.494,48.408 -60.553,48.401
GND on F.Cu "F.Cu-GND-135" (solid, remove dead copper, pour order 31155): 18 vertices, not listed, extent -15.011,2.079 -14.051,3.255
+3V3 on F.Cu "F.Cu-+3V3-58" (solid, remove dead copper, pour order 31360): -126.42,41.093 -126.415,41.013 -126.408,40.917 -126.412,40.819 -126.438,40.733 -126.464,40.699 -126.5,40.673 -126.22,40.502 -125.94,40.673 -125.994,40.72 -126.025,40.796 -126.032,40.911 -126.025,41.013 -126.02,41.093
HSIO_9_TX- on F.Cu "F.Cu-/LattePanda Module/HSIO_9_TX--2" (solid, remove dead copper, pour order 31532): -124.807,32.984 -124.989,32.92 -125.098,32.892 -125.207,32.874 -125.282,32.871 -125.348,32.88 -125.311,32.57 -125.03,32.419 -125.017,32.542 -124.969,32.66 -124.889,32.759 -124.807,32.814
Net-(Q1-D) on F.Cu "F.Cu-Net-(Q1-D)" (solid, remove dead copper, pour order 31732): -54.095,17.177 -53.955,17.118 -53.863,17.063 -53.784,17.001 -53.743,16.956 -53.721,16.911 -53.72,16.907 -53.44,17.136 -53.677,17.397 -53.709,17.305 -53.747,17.234 -53.778,17.197 -53.811,17.178 -53.845,17.177
+12V on F.Cu "F.Cu-+12V-5" (solid, remove dead copper, pour order 31893): -34.764,2.872 -34.855,2.877 -34.918,2.889 -34.972,2.907 -35.121,2.949 -35.161,2.752 -35.121,2.556 -35.002,2.596 -34.958,2.62 -34.882,2.657 -34.831,2.668 -34.764,2.672
DDC_SCL on F.Cu "F.Cu-/HDMI/DDC_SCL-5" (solid, remove dead copper, pour order 31404): -50.153,17.025 -50.048,17.018 -49.924,16.99 -49.863,16.963 -49.812,16.925 -49.785,16.892 -49.767,16.852 -49.537,17.136 -49.767,17.42 -49.806,17.36 -49.881,17.315 -49.998,17.285 -50.153,17.275
Net-(Q7-G) on F.Cu "F.Cu-Net-(Q7-G)-5" (solid, remove dead copper, pour order 32074): -31.01,12 -31.01,11.987 -31.01,11.938 -31.019,11.885 -31.043,11.843 -31.063,11.83 -31.09,11.825 -30.92,11.649 -30.74,11.825 -30.765,11.83 -30.784,11.843 -30.806,11.889 -30.81,11.981 -30.81,12
GND on F.Cu "F.Cu-GND-134" (solid, remove dead copper, pour order 31763): -60.015,39.666 -60.02,39.585 -60.032,39.528 -60.056,39.466 -60.082,39.402 -60.106,39.309 -59.91,39.269 -59.714,39.309 -59.754,39.437 -59.77,39.469 -59.801,39.547 -59.815,39.666
+3V3 on F.Cu "F.Cu-+3V3-57" (solid, remove dead copper, pour order 31660): -107.995,30.88 -108.021,30.878 -108.101,30.879 -108.132,30.895 -108.145,30.93 -108.921,30.78 -108.145,30.63 -108.14,30.653 -108.128,30.669 -108.083,30.683 -108.021,30.682 -107.995,30.68
Net-(U16-BOOST) on F.Cu "F.Cu-Net-(U16-BOOST)-1" (solid, remove dead copper, pour order 31396): -5.03,24.91 -5.025,24.843 -5.018,24.761 -5.021,24.678 -5.048,24.61 -5.074,24.587 -5.11,24.573 -4.83,24.349 -4.55,24.573 -4.582,24.584 -4.605,24.602 -4.635,24.66 -4.642,24.754 -4.635,24.843 -4.63,24.91
DDC_SCL on F.Cu "F.Cu-/HDMI/DDC_SCL-4" (solid, remove dead copper, pour order 31593): -50.685,17.7 -50.685,17.676 -50.686,17.59 -50.696,17.493 -50.726,17.409 -50.751,17.379 -50.786,17.36 -50.485,17.159 -50.249,17.42 -50.289,17.426 -50.324,17.44 -50.379,17.492 -50.417,17.577 -50.435,17.687 -50.435,17.7
TMDS_D1+ on F.Cu "F.Cu-/HDMI/TMDS_D1+-6" (solid, remove dead copper, pour order 31445): -42.163,14.812 -42.112,14.754 -42.06,14.677 -42.023,14.602 -41.999,14.522 -41.993,14.463 -41.999,14.405 -42.005,14.383 -41.684,14.429 -41.564,14.7 -41.665,14.716 -41.788,14.773 -41.93,14.877 -42.017,14.958
HSIO_8_TX+ on F.Cu "F.Cu-/LattePanda Module/HSIO_8_TX+-1" (solid, remove dead copper, pour order 31543): -124.807,37.266 -124.889,37.32 -124.932,37.367 -124.971,37.423 -125.001,37.486 -125.021,37.555 -125.03,37.661 -125.311,37.51 -125.348,37.2 -125.242,37.209 -125.082,37.185 -124.874,37.121 -124.807,37.096
SUSCLK_WIFI on F.Cu "F.Cu-/LattePanda Module/SUSCLK_WIFI-7" (solid, remove dead copper, pour order 31637): -104.77,64.94 -104.84,64.946 -104.923,64.965 -104.983,64.991 -105.032,65.028 -105.057,65.061 -105.071,65.1 -105.073,65.11 -105.311,64.84 -105.073,64.57 -105.046,64.635 -104.987,64.687 -104.889,64.725 -104.77,64.74
TMDS_D2+ on F.Cu "F.Cu-/HDMI/TMDS_D2+-4" (solid, remove dead copper, pour order 31462): -39.679,17.697 -39.632,17.785 -39.591,17.83 -39.539,17.87 -39.483,17.9 -39.419,17.921 -39.317,17.93 -39.475,18.211 -39.785,18.238 -39.777,18.137 -39.801,17.981 -39.862,17.768 -39.884,17.697
Net-(Q4-D) on F.Cu "F.Cu-Net-(Q4-D)-6" (solid, remove dead copper, pour order 31250): -57.253,17.676 -57.254,17.682 -57.256,17.742 -57.246,17.809 -57.208,17.872 -57.175,17.897 -57.129,17.918 -57.418,18.563 -57.703,17.913 -57.649,17.877 -57.603,17.8 -57.566,17.665 -57.538,17.426 -57.536,17.393
GND on F.Cu "F.Cu-GND-133" (solid, remove dead copper, pour order 31780): -48.565,33.794 -48.56,33.875 -48.548,33.932 -48.524,33.994 -48.498,34.058 -48.474,34.151 -48.67,34.191 -48.866,34.151 -48.826,34.023 -48.81,33.991 -48.779,33.913 -48.765,33.794
Net-(D26-A) on F.Cu "F.Cu-Net-(D26-A)-3" (solid, remove dead copper, pour order 31414): -85.36,81.04 -85.366,81.101 -85.373,81.175 -85.371,81.249 -85.345,81.306 -85.32,81.324 -85.285,81.332 -85.56,81.591 -85.835,81.332 -85.803,81.325 -85.779,81.311 -85.752,81.262 -85.747,81.177 -85.754,81.101 -85.76,81.04
GND on F.Cu "F.Cu-GND-132" (solid, remove dead copper, pour order 31788): -56.815,41.994 -56.81,42.075 -56.798,42.132 -56.774,42.194 -56.748,42.258 -56.724,42.351 -56.92,42.391 -57.116,42.351 -57.076,42.223 -57.06,42.191 -57.029,42.113 -57.015,41.994
MDI1+ on F.Cu "F.Cu-/Gigabit Ethernet/MDI1+-1" (solid, remove dead copper, pour order 32116): -92.986,27.107 -93.005,27.258 -93.028,27.419 -93.035,27.6 -93.135,27.591 -93.161,27.19 -93.138,27.188 -93.122,27.178 -93.105,27.14 -93.102,27.109 -93.102,27.107
TMDS_D1- on F.Cu "F.Cu-/HDMI/TMDS_D1--5" (solid, remove dead copper, pour order 32102): -43.077,10.448 -43.082,10.48 -43.09,10.541 -43.08,10.564 -43.055,10.572 -43.18,10.886 -43.305,10.572 -43.285,10.568 -43.274,10.555 -43.271,10.513 -43.278,10.48 -43.283,10.448
GND on F.Cu "F.Cu-GND-131" (solid, remove dead copper, pour order 31342): -44.33,5.355 -44.332,5.381 -44.331,5.461 -44.315,5.492 -44.28,5.505 -44.43,6.806 -44.58,5.505 -44.557,5.5 -44.541,5.488 -44.527,5.443 -44.528,5.381 -44.53,5.355
HSIO_10_RX- on F.Cu "F.Cu-/LattePanda Module/HSIO_10_RX-" (solid, remove dead copper, pour order 31959): -59.114,36.753 -59.123,36.591 -59.129,36.492 -59.11,36.351 -58.914,36.389 -58.748,36.501 -58.814,36.573 -58.857,36.602 -58.891,36.626 -58.919,36.654 -58.937,36.694 -58.944,36.753
TMDS_CK- on F.Cu "F.Cu-/HDMI/TMDS_CK--3" (solid, remove dead copper, pour order 31436): -47.853,14.958 -47.962,14.859 -48.106,14.76 -48.182,14.725 -48.258,14.704 -48.306,14.7 -48.186,14.429 -47.865,14.383 -47.877,14.475 -47.854,14.583 -47.792,14.706 -47.707,14.812
{\R\S\T\_\S\W\}\ on F.Cu "F.Cu-/LattePanda Module/~{RST_SW}-1" (solid, remove dead copper, pour order 31752): -103.536,82.294 -103.481,82.233 -103.449,82.183 -103.422,82.124 -103.394,82.061 -103.346,81.979 -103.179,82.089 -103.069,82.256 -103.187,82.317 -103.222,82.33 -103.3,82.361 -103.394,82.436
Net-(U14-VDD) on F.Cu "F.Cu-Net-(U14-VDD)-2" (solid, remove dead copper, pour order 31377): -12.615,8.865 -12.613,8.935 -12.598,9.019 -12.582,9.058 -12.559,9.09 -12.527,9.112 -12.485,9.12 -12.74,9.671 -12.995,9.12 -12.962,9.115 -12.935,9.102 -12.895,9.053 -12.871,8.967 -12.865,8.865
+3V3 on F.Cu "F.Cu-+3V3-56" (solid, remove dead copper, pour order 31274): -49.51,19.41 -49.505,19.486 -49.487,19.576 -49.46,19.654 -49.422,19.724 -49.387,19.764 -49.345,19.793 -49.321,19.803 -49.61,20.448 -49.899,19.803 -49.831,19.762 -49.774,19.684 -49.73,19.564 -49.71,19.41
+1V0 on F.Cu "F.Cu-+1V0-10" (solid, remove dead copper, pour order 31822): -91.086,26.336 -91.034,26.278 -91.003,26.229 -90.976,26.165 -90.95,26.101 -90.901,26.016 -90.734,26.126 -90.624,26.293 -90.746,26.358 -90.773,26.368 -90.851,26.402 -90.944,26.478
HSIO_0_TX- on F.Cu "F.Cu-/LattePanda Module/HSIO_0_TX--1" (solid, remove dead copper, pour order 31517): -120.251,20.998 -120.179,20.774 -120.151,20.643 -120.143,20.52 -120.152,20.456 -119.842,20.491 -119.69,20.772 -119.812,20.785 -119.929,20.834 -120.027,20.913 -120.081,20.998
Net-(J6-CT) on F.Cu "F.Cu-Net-(J6-CT)-1" (solid, remove dead copper, pour order 31300): -97.278,18.96 -97.213,19.032 -97.139,19.116 -97.054,19.195 -96.959,19.253 -96.907,19.267 -96.854,19.27 -96.969,19.551 -97.28,19.636 -97.284,19.555 -97.326,19.47 -97.413,19.373 -97.493,19.302 -97.56,19.242
SOC_UART1_RX on F.Cu "F.Cu-/GPIO/SOC_UART1_RX-4" (solid, remove dead copper, pour order 31062): 23 vertices, not listed, extent -98.336,87.214 -97.174,88.376
SOC_UART1_TX on F.Cu "F.Cu-/GPIO/SOC_UART1_TX-2" (solid, remove dead copper, pour order 31999): -59.817,74.383 -59.862,74.435 -59.889,74.479 -59.915,74.558 -59.935,74.63 -59.984,74.721 -60.151,74.611 -60.261,74.444 -60.151,74.389 -60.098,74.375 -60.018,74.348 -59.974,74.321 -59.923,74.277
GND on F.Cu "F.Cu-GND-130" (solid, remove dead copper, pour order 31758): -28.015,39.926 -28.02,39.846 -28.032,39.788 -28.056,39.726 -28.082,39.662 -28.106,39.569 -27.91,39.529 -27.714,39.569 -27.754,39.697 -27.77,39.729 -27.801,39.807 -27.815,39.926
+5V on F.Cu "F.Cu-+5V-10" (solid, remove dead copper, pour order 31077): 19 vertices, not listed, extent -88.138,78.289 -86.962,79.653
GND on F.Cu "F.Cu-GND-129" (solid, remove dead copper, pour order 31859): -58.739,34.129 -58.681,34.181 -58.632,34.212 -58.568,34.239 -58.504,34.265 -58.419,34.314 -58.529,34.481 -58.696,34.591 -58.761,34.469 -58.771,34.442 -58.805,34.364 -58.881,34.271
CON_PCIE_TX_1- on F.Cu "F.Cu-/M.2 E&M Key/CON_PCIE_TX_1--1" (solid, remove dead copper, pour order 31551): -106.801,43.759 -106.719,43.703 -106.676,43.655 -106.638,43.597 -106.608,43.533 -106.588,43.463 -106.58,43.361 -106.299,43.51 -106.26,43.82 -106.366,43.812 -106.524,43.836 -106.729,43.9 -106.801,43.929
TMDS_D1+ on F.Cu "F.Cu-/HDMI/TMDS_D1+-5" (solid, remove dead copper, pour order 32105): -42.577,10.448 -42.582,10.48 -42.59,10.541 -42.58,10.564 -42.555,10.572 -42.68,10.886 -42.805,10.572 -42.785,10.568 -42.774,10.555 -42.771,10.513 -42.778,10.48 -42.783,10.448
Net-(J6-PadL1) on F.Cu "F.Cu-Net-(J6-PadL1)-1" (solid, remove dead copper, pour order 31697): -88.485,19.077 -88.469,19.162 -88.445,19.209 -88.41,19.252 -88.372,19.28 -88.325,19.3 -88.294,19.306 -88.571,19.541 -88.834,19.299 -88.773,19.274 -88.715,19.209 -88.661,19.096 -88.628,18.952 -88.627,18.935
CON_USB4_D_P on F.Cu "F.Cu-/USB2.0&USB3.0/CON_USB4_D_P-3" (solid, remove dead copper, pour order 31408): -117.028,16.913 -116.948,16.875 -116.905,16.839 -116.866,16.792 -116.834,16.737 -116.81,16.674 -116.798,16.612 -116.797,16.545 -116.798,16.529 -116.479,16.688 -116.401,16.983 -116.541,16.983 -116.757,17.019 -116.916,17.057 -117.028,17.083
GND on F.Cu "F.Cu-GND-128" (solid, remove dead copper, pour order 31188): 19 vertices, not listed, extent -98.985,30.639 -97.899,31.828
GND on F.Cu "F.Cu-GND-127" (solid, remove dead copper, pour order 31860): -69.149,34.439 -69.091,34.491 -69.042,34.522 -68.978,34.549 -68.914,34.575 -68.829,34.624 -68.939,34.791 -69.106,34.901 -69.171,34.779 -69.181,34.752 -69.215,34.674 -69.291,34.581
VPullup on F.Cu "F.Cu-VPullup-4" (solid, remove dead copper, pour order 31857): -27.454,46.48 -27.532,46.485 -27.588,46.497 -27.653,46.523 -27.717,46.551 -27.811,46.576 -27.851,46.38 -27.811,46.184 -27.679,46.225 -27.653,46.237 -27.574,46.267 -27.454,46.28
GND on F.Cu "F.Cu-GND-126" (solid, remove dead copper, pour order 31756): -22.015,39.926 -22.02,39.846 -22.032,39.788 -22.056,39.726 -22.082,39.662 -22.106,39.569 -21.91,39.529 -21.714,39.569 -21.754,39.697 -21.77,39.729 -21.801,39.807 -21.815,39.926
CON_USB4_SSRX_P on F.Cu "F.Cu-/USB2.0&USB3.0/CON_USB4_SSRX_P-2" (solid, remove dead copper, pour order 32034): -113.001,17.882 -113.001,17.877 -113.01,17.803 -113.033,17.771 -113.078,17.758 -113.03,17.444 -112.905,17.428 -112.893,17.567 -112.863,17.702 -112.841,17.799 -112.831,17.882
LED1_1000 on F.Cu "F.Cu-/Gigabit Ethernet/LED1_1000" (solid, remove dead copper, pour order 32149): -95.385,30.465 -95.354,30.467 -95.286,30.47 -95.256,30.461 -95.235,30.44 -94.884,30.54 -95.235,30.64 -95.267,30.613 -95.327,30.609 -95.354,30.612 -95.385,30.615
GND on F.Cu "F.Cu-GND-125" (solid, remove dead copper, pour order 31400): -98.405,31.721 -98.47,31.794 -98.538,31.889 -98.588,31.977 -98.626,32.07 -98.642,32.141 -98.645,32.21 -98.645,32.216 -98.926,32.1 -99.011,31.79 -98.911,31.789 -98.792,31.751 -98.655,31.67 -98.547,31.58
GND on F.Cu "F.Cu-GND-124" (solid, remove dead copper, pour order 31681): -117.395,27.93 -117.369,27.932 -117.289,27.931 -117.258,27.915 -117.245,27.88 -116.469,28.03 -117.245,28.18 -117.25,28.157 -117.262,28.141 -117.307,28.127 -117.369,28.128 -117.395,28.13
GbE_PCIe_RX+ on F.Cu "F.Cu-/Gigabit Ethernet/GbE_PCIe_RX+-1" (solid, remove dead copper, pour order 31519): -89.944,35.785 -89.872,35.561 -89.844,35.431 -89.836,35.308 -89.845,35.244 -89.535,35.279 -89.382,35.56 -89.505,35.573 -89.622,35.621 -89.719,35.7 -89.774,35.785
Net-(Q4-D) on F.Cu "F.Cu-Net-(Q4-D)-5" (solid, remove dead copper, pour order 31737): -41.287,15.541 -41.144,15.446 -41.066,15.377 -41.004,15.304 -40.971,15.227 -40.685,15.449 -40.922,15.71 -40.949,15.641 -40.98,15.588 -41.01,15.555 -41.041,15.538 -41.081,15.541
GbE_PCIe_TX+ on F.Cu "F.Cu-/Gigabit Ethernet/GbE_PCIe_TX+" (solid, remove dead copper, pour order 31521): -86.125,30.448 -86.336,30.378 -86.461,30.35 -86.58,30.338 -86.667,30.348 -86.631,30.037 -86.35,29.885 -86.337,30.008 -86.289,30.125 -86.21,30.223 -86.125,30.278
+3V3 on F.Cu "F.Cu-+3V3-55" (solid, remove dead copper, pour order 31505): -2.665,28.13 -2.657,28.239 -2.623,28.364 -2.595,28.413 -2.557,28.453 -2.502,28.481 -2.76,28.721 -3.02,28.483 -2.969,28.446 -2.935,28.373 -2.917,28.255 -2.915,28.151 -2.915,28.13
HSIO_10_RX+ on F.Cu "F.Cu-/LattePanda Module/HSIO_10_RX+" (solid, remove dead copper, pour order 31926): -59.386,36.753 -59.391,36.702 -59.404,36.665 -59.448,36.619 -59.473,36.602 -59.527,36.564 -59.582,36.501 -59.416,36.389 -59.22,36.351 -59.204,36.456 -59.202,36.53 -59.207,36.591 -59.216,36.753
+3V3 on F.Cu "F.Cu-+3V3-54" (solid, remove dead copper, pour order 31991): -97.097,24.157 -97.045,24.202 -97.001,24.229 -96.922,24.255 -96.85,24.275 -96.759,24.324 -96.869,24.491 -97.036,24.601 -97.091,24.491 -97.105,24.438 -97.132,24.358 -97.159,24.314 -97.203,24.263
SOC_UART0_RX on F.Cu "F.Cu-/GPIO/SOC_UART0_RX-3" (solid, remove dead copper, pour order 31987): -100.013,82.543 -100.065,82.498 -100.109,82.471 -100.188,82.445 -100.26,82.425 -100.351,82.376 -100.241,82.209 -100.074,82.099 -100.019,82.209 -100.005,82.262 -99.978,82.342 -99.951,82.386 -99.907,82.437
+3V3 on F.Cu "F.Cu-+3V3-53" (solid, remove dead copper, pour order 31474): -106.205,46.84 -106.192,47.006 -106.166,47.097 -106.119,47.17 -106.061,47.206 -106.33,47.431 -106.599,47.206 -106.539,47.168 -106.494,47.095 -106.464,46.982 -106.455,46.84
Net-(U16-SW) on F.Cu "F.Cu-Net-(U16-SW)-1" (solid, remove dead copper, pour order 30956): -5.54,24.54 -5.54,23.66 -4.58,23.65 -4.58,22.99 -6.66,22.98 -8.22,25.41 -8.22,25.9 -6.89,25.92
HSIO_2_RX+ on F.Cu "F.Cu-/LattePanda Module/HSIO_2_RX+-1" (solid, remove dead copper, pour order 31952): -112.673,38.331 -112.511,38.322 -112.412,38.316 -112.271,38.335 -112.309,38.531 -112.421,38.697 -112.493,38.631 -112.522,38.588 -112.546,38.554 -112.574,38.526 -112.614,38.508 -112.673,38.501
+1V0 on F.Cu "F.Cu-+1V0-9" (solid, remove dead copper, pour order 31604): -95.485,34.435 -95.617,34.455 -95.693,34.482 -95.763,34.521 -95.807,34.558 -95.84,34.601 -95.851,34.629 -96.076,34.36 -95.851,34.09 -95.811,34.158 -95.731,34.218 -95.61,34.266 -95.485,34.285
GND on F.Cu "F.Cu-GND-123" (solid, remove dead copper, pour order 31714): -83.55,82.116 -83.556,81.967 -83.576,81.855 -83.576,81.853 -83.596,81.759 -83.4,81.719 -83.204,81.759 -83.224,81.853 -83.244,81.966 -83.25,82.116
MDI0- on F.Cu "F.Cu-/Gigabit Ethernet/MDI0-" (solid, remove dead copper, pour order 32113): -93.968,27.107 -93.968,27.109 -93.958,27.162 -93.941,27.184 -93.909,27.19 -93.935,27.591 -94.035,27.6 -94.044,27.405 -94.065,27.258 -94.084,27.107
Net-(J5-VBUS1) on F.Cu "F.Cu-Net-(J5-VBUS1)-1" (solid, remove dead copper, pour order 31206): 18 vertices, not listed, extent -68.017,13.808 -67.042,14.783
HPD on F.Cu "F.Cu-/HDMI/HPD-3" (solid, remove dead copper, pour order 31411): -52.683,15.561 -52.622,15.626 -52.473,15.778 -52.393,15.835 -52.354,15.852 -52.316,15.858 -52.489,16.153 -52.81,16.184 -52.762,16.091 -52.75,15.989 -52.773,15.878 -52.83,15.772 -52.859,15.737
REFCLK0+ on F.Cu "F.Cu-/LattePanda Module/REFCLK0+-2" (solid, remove dead copper, pour order 31482): -115.545,41.229 -115.853,41.208 -116.144,41.183 -116.48,41.18 -116.471,41.03 -115.695,40.974 -115.69,41.002 -115.678,41.023 -115.632,41.05 -115.546,41.059 -115.545,41.059
+12V on F.Cu "F.Cu-+12V-4" (solid, remove dead copper, pour order 30955): -31.17,11.175 -30.19,11.175 -30.19,13.35 -20.8,13.36 -20.83,18.78 -17.52,18.73 -17.54,9.77 -20.59,6.62 -22.06,5.15 -25.93,5.15 -30.305,9.525 -31.17,9.525
REFCLK2+ on F.Cu "F.Cu-/LattePanda Module/REFCLK2+-1" (solid, remove dead copper, pour order 31228): 18 vertices, not listed, extent -133.501,38.593 -132.461,39.507
GND on F.Cu "F.Cu-GND-122" (solid, remove dead copper, pour order 31858): -15.379,33.929 -15.321,33.981 -15.272,34.012 -15.208,34.039 -15.144,34.065 -15.059,34.114 -15.169,34.281 -15.336,34.391 -15.401,34.269 -15.411,34.242 -15.445,34.164 -15.521,34.071